# EAGLE board frets-analog (EAGLE 6.6.0)
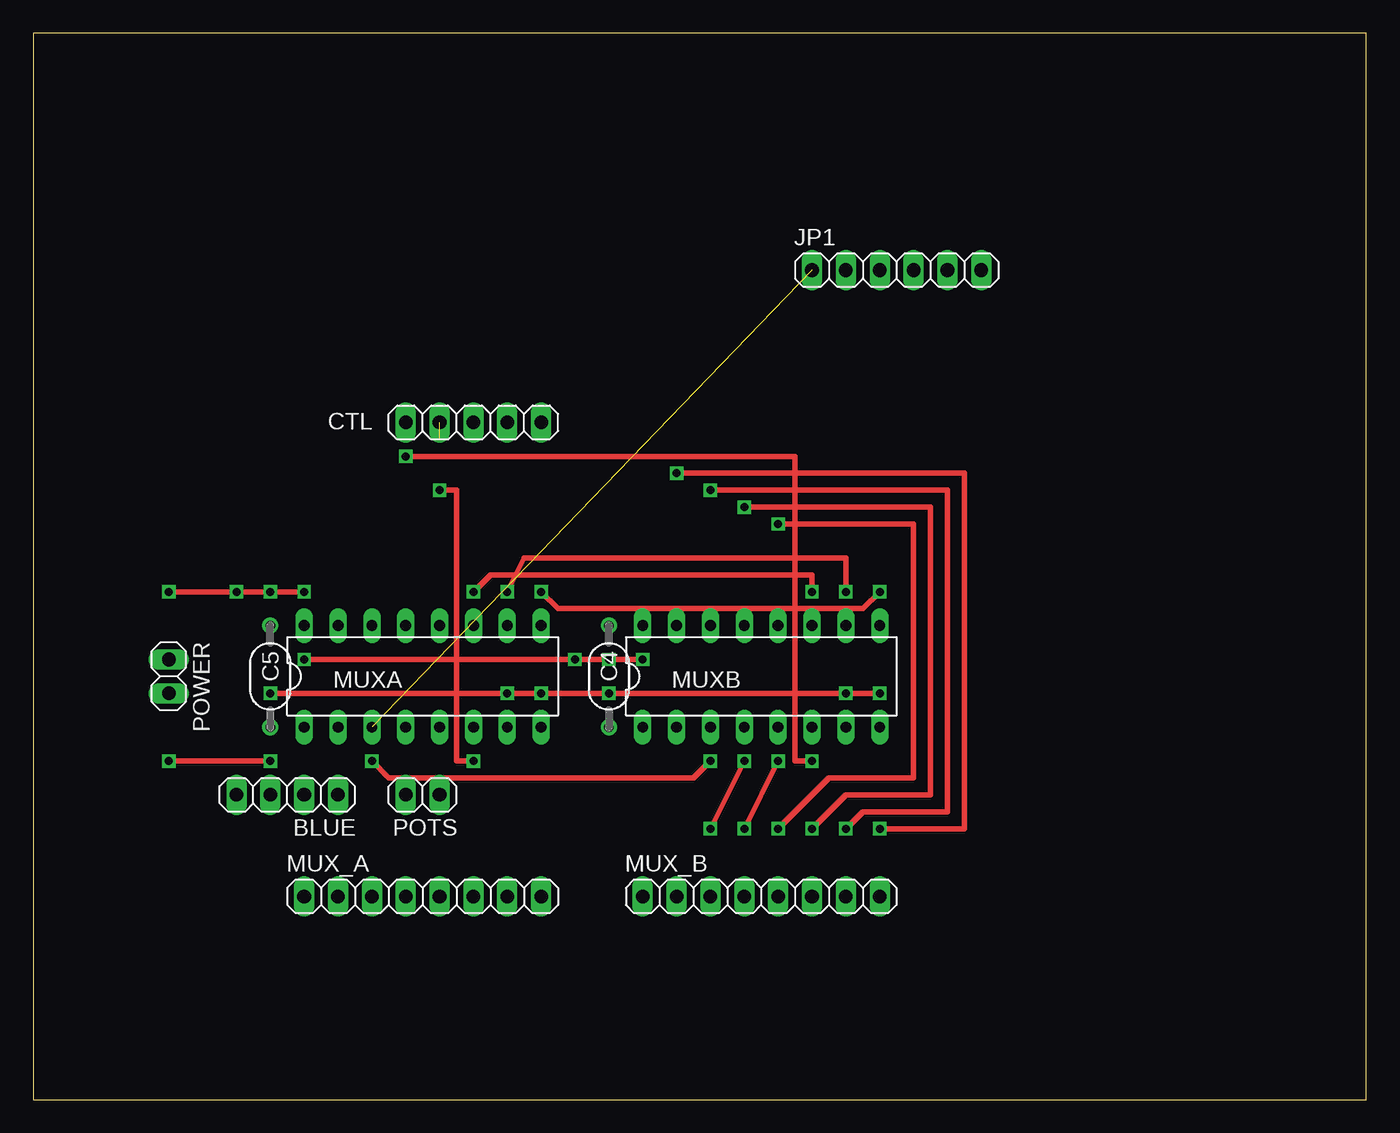
[diagram p0: board, top side]
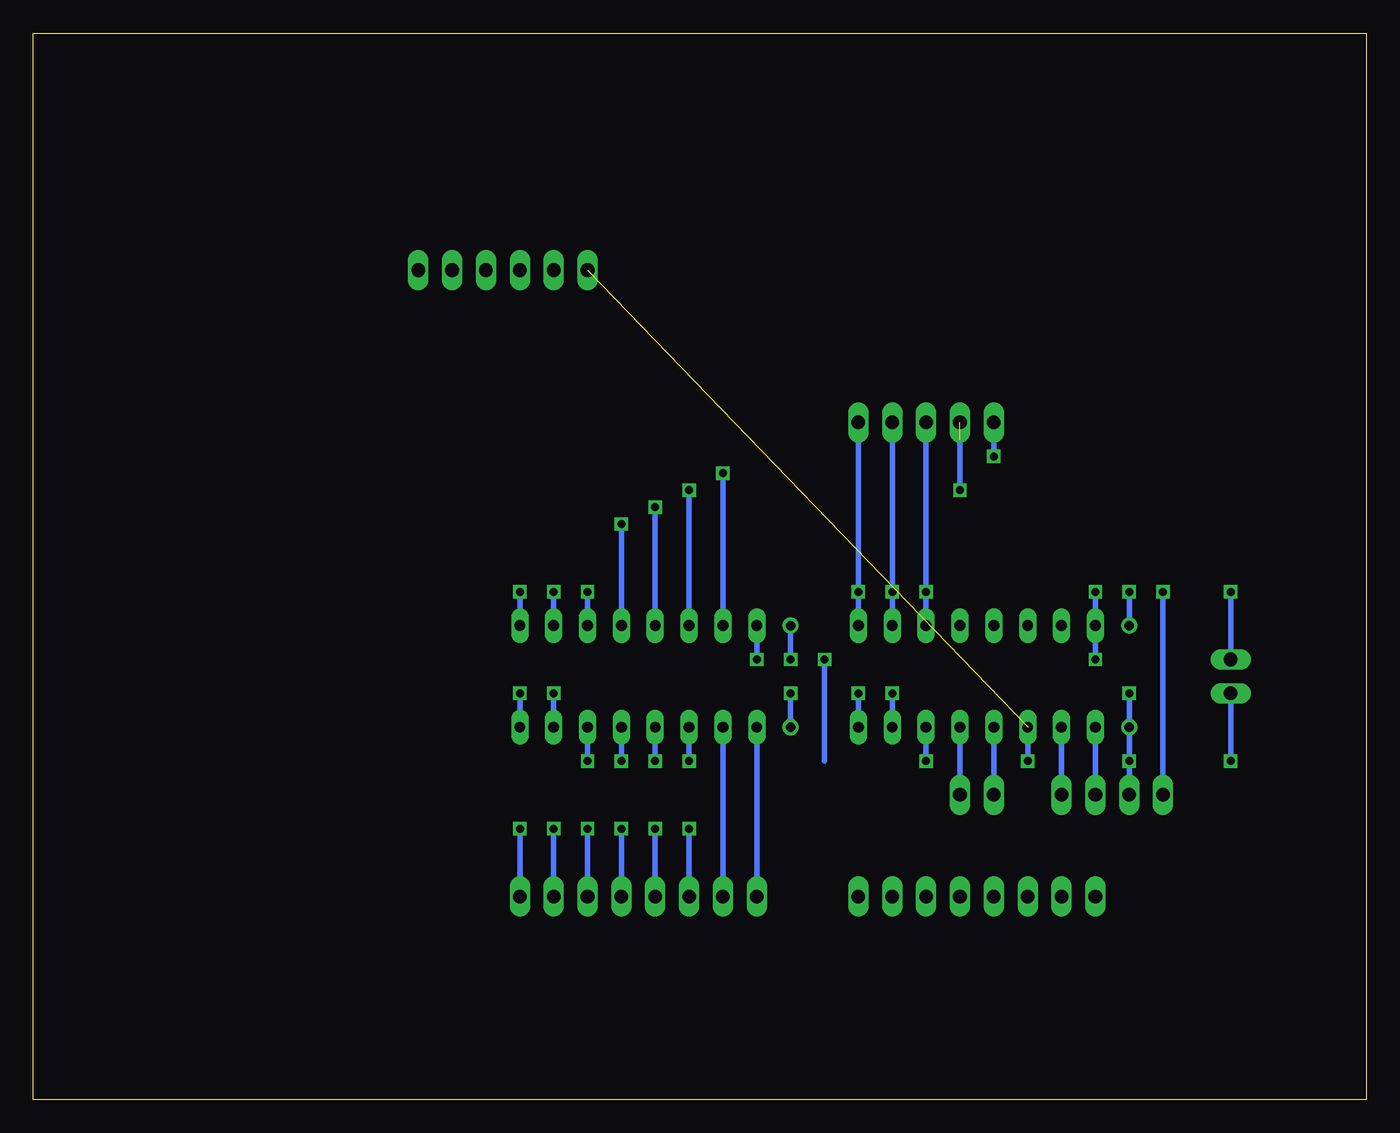
[diagram p1: board, bottom side, seen from below]

Size 100 x 80 mm. Coordinates in mm from the lower left corner, seen from the top.
Outline: 0,0 100,0 100,80 0,80 0,0
Copper layers (1*16): Top 0.035mm / dielectric 1.5mm / Bottom 0.035mm
Design rules "default": minimum track width 10mil, minimum drill 24mil, track to track 8mil, track to pad 8mil, pad to pad 8mil, via to via 8mil, smd to smd 8mil, copper to edge 40mil, drill to drill 8mil, minimum pad ring 10mil, minimum via ring 8mil, stop-mask expansion 4mil, vias tented up to drill 0mil, thermal gap 10mil

## Footprints (pad centres in the part's own frame; a part is rotated, then mirrored left to right if it is on the bottom)
1X04 = drill 1.016 long: 1 -3.81,0; 2 -1.27,0; 3 1.27,0; 4 3.81,0
050X030_050_3 = drill 0.7: 1 -3.81,0; 2 3.81,0
1X05 = drill 1.016 long: 1 -5.08,0; 2 -2.54,0; 3 0,0; 4 2.54,0; 5 5.08,0
1X06 = drill 1.016 long: 1 -6.35,0; 2 -3.81,0; 3 -1.27,0; 4 1.27,0; 5 3.81,0; 6 6.35,0
1X08 = drill 1.016 long: 1 -8.89,0; 2 -6.35,0; 3 -3.81,0; 4 -1.27,0; 5 1.27,0; 6 3.81,0; 7 6.35,0; 8 8.89,0
DIL16 = drill 0.813 long: 1 -8.89,-3.81; 2 -6.35,-3.81; 3 -3.81,-3.81; 4 -1.27,-3.81; 5 1.27,-3.81; 6 3.81,-3.81; 7 6.35,-3.81; 8 8.89,-3.81; 9 8.89,3.81; 10 6.35,3.81; 11 3.81,3.81; 12 1.27,3.81; 13 -1.27,3.81; 14 -3.81,3.81; 15 -6.35,3.81; 16 -8.89,3.81
1X02 = drill 1.016 long: 1 -1.27,0; 2 1.27,0

## Placement (x,y rotation side)
BLUE  [1X04]  19.05,22.86 180 top
C4  100n  [050X030_050_3]  43.18,31.75 270 top
C5  100n  [050X030_050_3]  17.78,31.75 270 top
CTL  [1X05]  33.02,50.8 180 top
JP1  [1X06]  64.77,62.23 0 top
MUX_A  [1X08]  29.21,15.24 0 top
MUX_B  [1X08]  54.61,15.24 0 top
MUXA  4051N  [DIL16]  29.21,31.75 0 top
MUXB  4051N  [DIL16]  54.61,31.75 0 top
POTS  [1X02]  29.21,22.86 180 top
POWER  [1X02]  10.16,31.75 270 top

## Library data of the parts
BLUE CTL JP1 MUX_A MUX_B POTS POWER = pinhead
C4 C5 = gm-caps-ceramic
MUXA MUXB = 40xx

## Nets
GND: BLUE.3 C4.2 C5.2 MUXA.7 MUXA.8 MUXB.7 MUXB.8 POWER.2
INH_A: CTL.4 MUXA.6
INH_B: CTL.5 MUXB.6
JOY_X: BLUE.1 MUXA.2
JOY_Y: BLUE.2 MUXA.1
MX_A: CTL.3 MUXA.11 MUXB.11
MX_B: CTL.2 MUXA.10 MUXB.10
MX_C: CTL.1 MUXA.9 MUXB.9
N$1: JP1.1 MUXA.3 MUXB.3
N$2: MUX_B.1 MUXB.1
N$3: MUX_B.2 MUXB.2
N$4: MUX_B.3 MUXB.4
N$5: MUX_B.4 MUXB.5
N$6: MUX_B.5 MUXB.12
N$7: MUX_B.6 MUXB.13
N$8: MUX_B.7 MUXB.14
N$9: MUX_B.8 MUXB.15
POT_A: MUXA.5 POTS.1
POT_B: MUXA.4 POTS.2
VA: BLUE.4 C4.1 C5.1 MUXA.16 MUXB.16 POWER.1

## Tracks (layer width: path | path; a pad name or v marks a point on that pad's centre or on a via)
GND  (via drill 0.6)
  Top 0.406: v63.5,30.48 v60.96,30.48 v43.18,30.48 v38.1,30.48 v35.56,30.48 v17.78,30.48 | v10.16,25.4 v17.78,25.4
  Bottom 0.406: POWER.2 v10.16,25.4 | MUXA.7 v35.56,30.48 | MUXA.8 v38.1,30.48 | v43.18,30.48 C4.2 | MUXB.7 v60.96,30.48 | MUXB.8 v63.5,30.48 | v17.78,30.48 C5.2 v17.78,25.4 BLUE.3
INH_A  (via drill 0.6)  (1 unrouted)
  Top 0.406: v33.02,25.4 31.75,25.4 31.75,45.72 v30.48,45.72
  Bottom 0.406: MUXA.6 v33.02,25.4 | v30.48,45.72 30.48,49.53
INH_B  (via drill 0.6)
  Top 0.406: v27.94,48.26 57.15,48.26 57.15,25.4 v58.42,25.4
  Bottom 0.406: CTL.5 v27.94,48.26 | v58.42,25.4 MUXB.6
JOY_X
  Bottom 0.406: MUXA.2 BLUE.1
JOY_Y
  Bottom 0.406: MUXA.1 BLUE.2
MX_A  (via drill 0.6)
  Top 0.406: v33.02,38.1 34.29,39.37 58.42,39.37 v58.42,38.1
  Bottom 0.406: CTL.3 v33.02,38.1 MUXA.11 | MUXB.11 v58.42,38.1
MX_B  (via drill 0.6)
  Top 0.406: v60.96,38.1 60.96,40.64 36.83,40.64 v35.56,38.1
  Bottom 0.406: CTL.2 v35.56,38.1 MUXA.10 | MUXB.10 v60.96,38.1
MX_C  (via drill 0.6)
  Top 0.406: v63.5,38.1 62.23,36.83 39.37,36.83 v38.1,38.1
  Bottom 0.406: CTL.1 v38.1,38.1 MUXA.9 | MUXB.9 v63.5,38.1
N$1  (via drill 0.6)  (1 unrouted)
  Top 0.406: v25.4,25.4 26.67,24.13 49.53,24.13 v50.8,25.4
  Bottom 0.406: MUXB.3 v50.8,25.4 | v25.4,25.4 MUXA.3
N$2
  Bottom 0.406: MUX_B.1 MUXB.1
N$3
  Bottom 0.406: MUXB.2 MUX_B.2
N$4  (via drill 0.6)
  Top 0.406: v50.8,20.32 v53.34,25.4
  Bottom 0.406: MUX_B.3 v50.8,20.32 | v53.34,25.4 MUXB.4
N$5  (via drill 0.6)
  Top 0.406: v53.34,20.32 v55.88,25.4
  Bottom 0.406: MUX_B.4 v53.34,20.32 | v55.88,25.4 MUXB.5
N$6  (via drill 0.6)
  Top 0.406: v55.88,43.18 66.04,43.18 66.04,24.13 59.69,24.13 v55.88,20.32
  Bottom 0.406: MUXB.12 v55.88,43.18 | v55.88,20.32 MUX_B.5
N$7  (via drill 0.6)
  Top 0.406: v53.34,44.45 67.31,44.45 67.31,22.86 60.96,22.86 v58.42,20.32
  Bottom 0.406: MUXB.13 v53.34,44.45 | MUX_B.6 v58.42,20.32
N$8  (via drill 0.6)
  Top 0.406: v50.8,45.72 68.58,45.72 68.58,21.59 62.23,21.59 v60.96,20.32
  Bottom 0.406: MUXB.14 v50.8,45.72 | MUX_B.7 v60.96,20.32
N$9  (via drill 0.6)
  Top 0.406: v48.26,46.99 69.85,46.99 69.85,20.32 v63.5,20.32
  Bottom 0.406: MUXB.15 v48.26,46.99 | MUX_B.8 v63.5,20.32
POT_A
  Bottom 0.406: MUXA.5 POTS.1
POT_B
  Bottom 0.406: MUXA.4 POTS.2
VA  (via drill 0.6)
  Top 0.406: v20.32,38.1 v17.78,38.1 v15.24,38.1 v10.16,38.1 | v45.72,33.02 v43.18,33.02 v40.64,33.02 v20.32,33.02
  Bottom 0.406: C5.1 v17.78,38.1 | v20.32,38.1 MUXA.16 v20.32,33.02 | POWER.1 v10.16,38.1 | MUXB.16 v45.72,33.02 | v43.18,33.02 C4.1 | v40.64,33.02 40.64,25.4 | BLUE.4 v15.24,38.1